# Altium PCB UZ_D_ENDAT.PcbDoc (part 2 of 2)
Units mm, origin at the board's own origin, x right, y up, seen from the top; angles counter-clockwise.
Board outline 155.99 x 100.01 mm, 4 copper layers (Top Layer, GND, VCC, Bottom Layer), stack 0.98 mm thick; 164 components, 121 nets, 547 pads, 92 vias.
Unrouted connection lines stored in the file: 157.
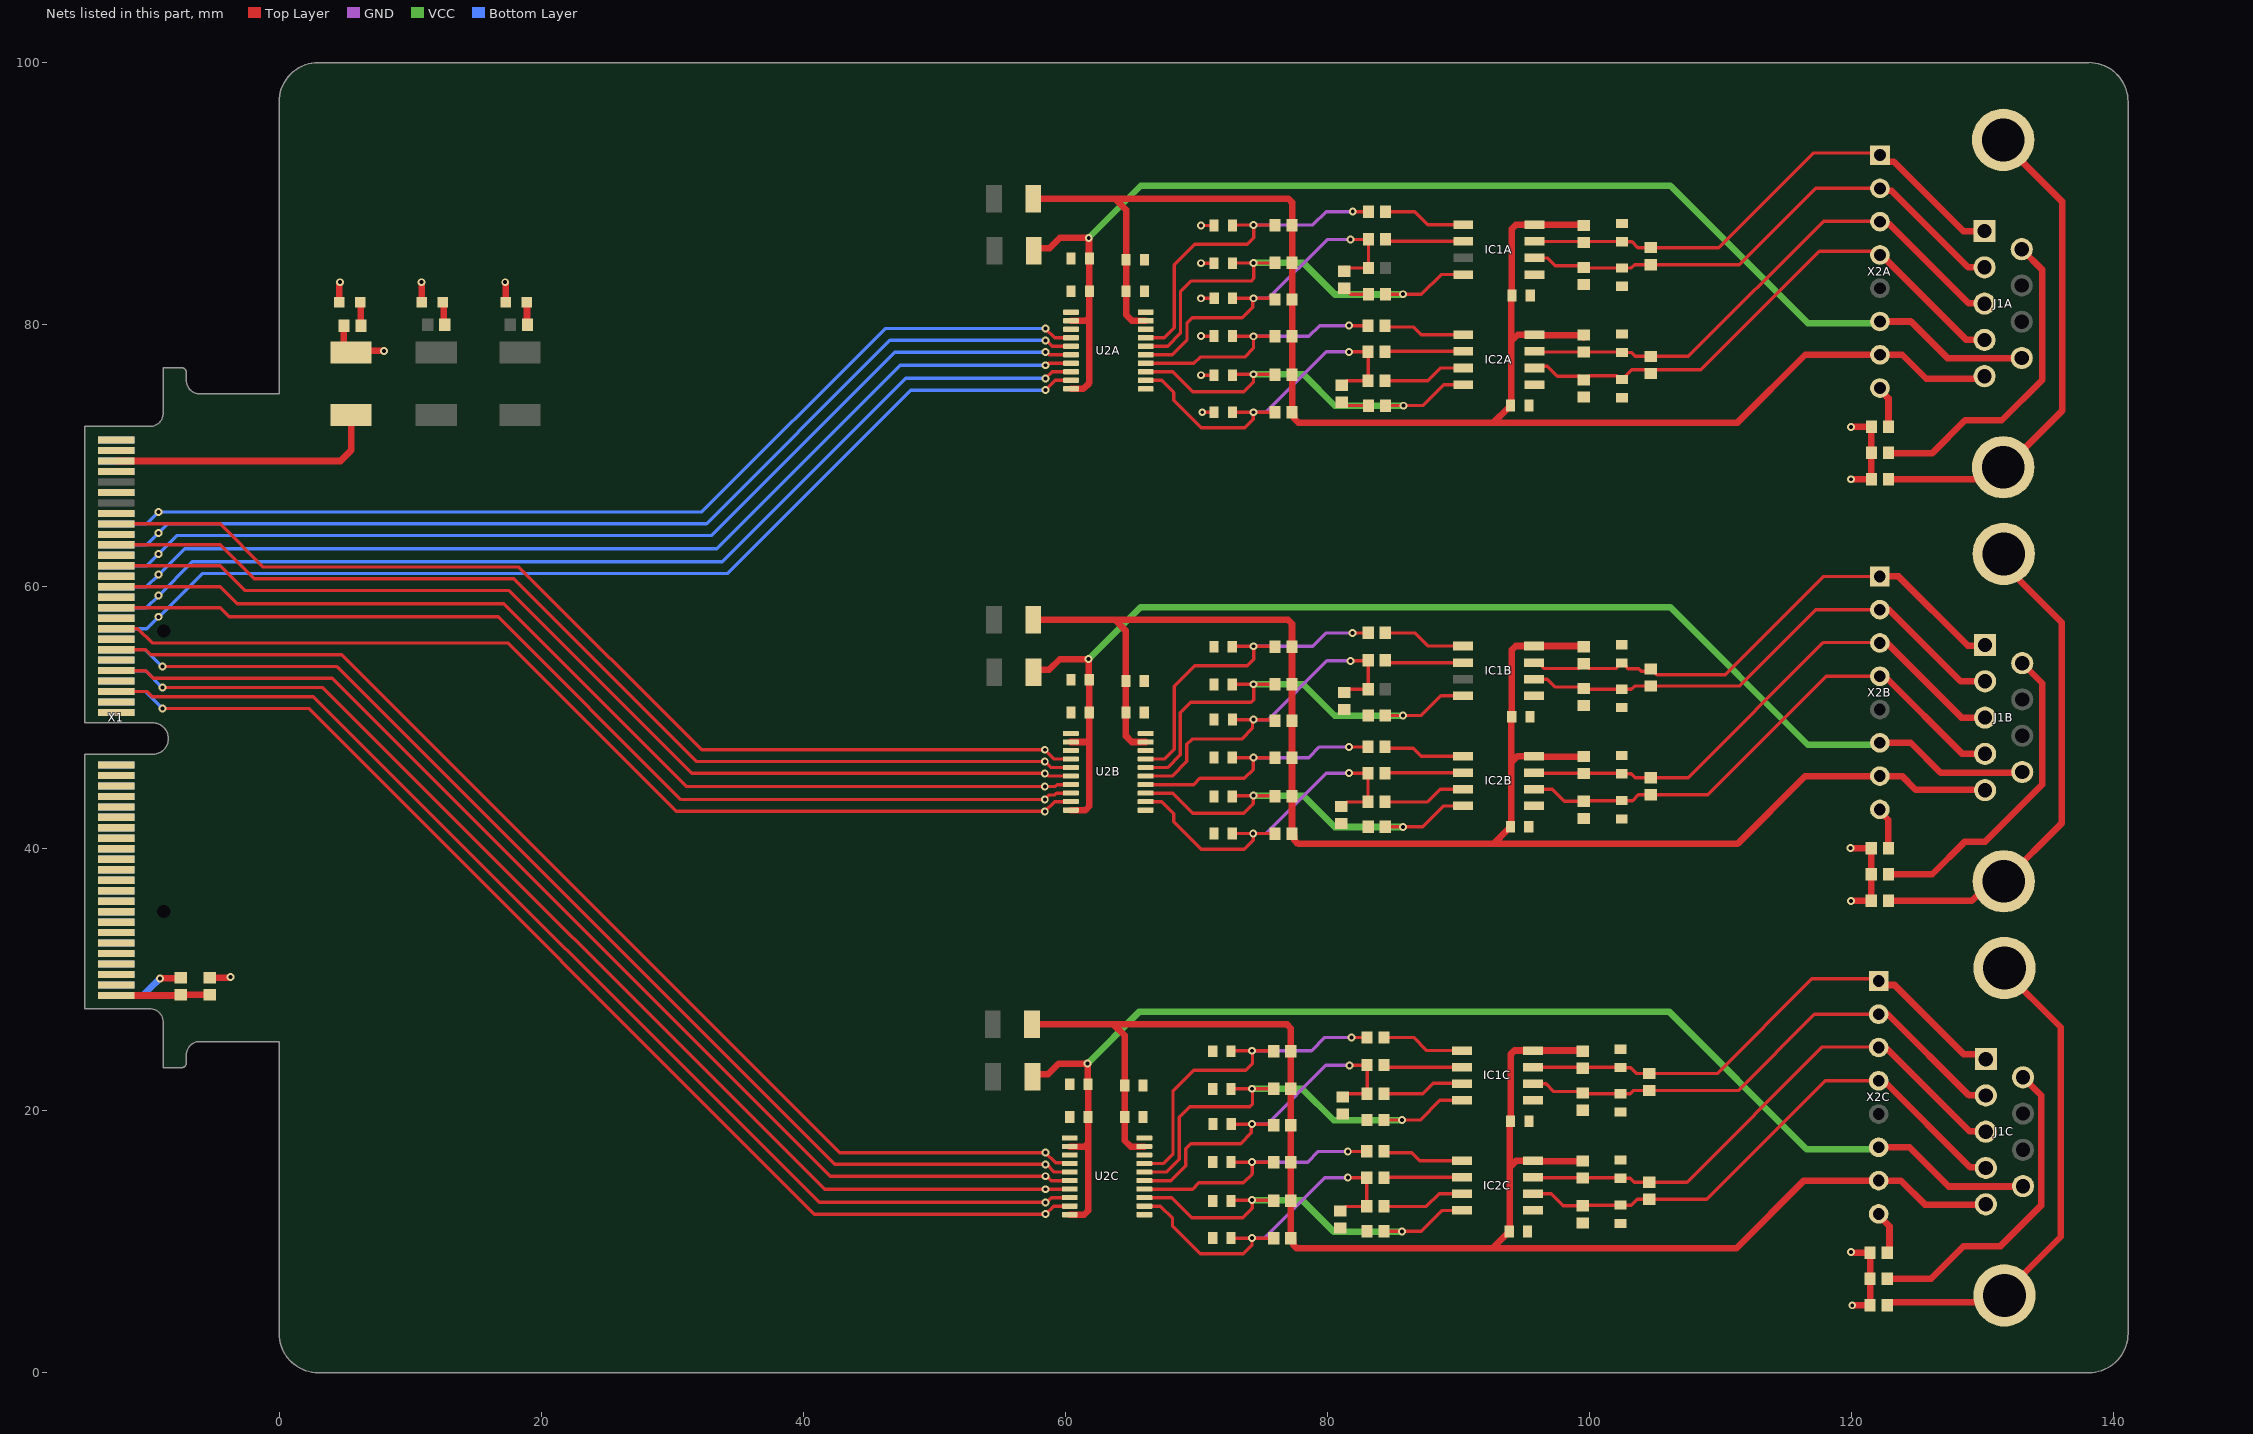
[diagram p4: the nets of this part, all layers, seen from the top]

## Via types
v1: diameter 0.6, hole 0.3, Top Layer to Bottom Layer, tented both sides, 92 vias

## Nets (pads, with @x,y where several pads share a name; then routed paths per layer and width w, separated by ;. In a path a pad name is that pad's centre, name@x,y a point inside that pad or via, vN(x,y) a via of type N, cw(c..) or ccw(c..) an arc to the next point about the centre after c; other vN are vias at no path point) (continued)
75_DE1C: IC1C.3 R12C.2 | length 5.7
  Top Layer w0.254: R12C.2@84.353,21.288 87.303,21.288 88.103,22.088 IC1C.3@89.725,22.088
75_DE2A: IC2A.3 R17A.2 | length 6.4
  Top Layer w0.254: R17A.2@84.428,75.725 87.678,75.725 88.643,76.69 IC2A.3@90.391,76.69
75_DE2B: IC2B.3 R17B.2 | length 6.4
  Top Layer w0.254: R17B.2@84.416,43.566 87.666,43.566 88.631,44.531 IC2B.3@90.379,44.531
75_DE2C: IC2C.3 R17C.2 | length 6.4
  Top Layer w0.254: R17C.2@84.328,12.688 87.578,12.688 88.543,13.653 IC2C.3@90.291,13.653
75_R1A: IC1A.1 R10A.2 | length 6.5
  Top Layer w0.254: R10A.2@84.453,88.625 86.703,88.625 87.698,87.63 IC1A.1@90.491,87.63
75_R1B: IC1B.1 R10B.2 | length 6.5
  Top Layer w0.254: R10B.2@84.441,56.466 86.691,56.466 87.686,55.471 IC1B.1@90.479,55.471
75_R1C: IC1C.1 R10C.2 | length 6.5
  Top Layer w0.254: R10C.2@84.353,25.588 86.603,25.588 87.598,24.593 IC1C.1@90.391,24.593
75_R2A: IC2A.1 R13A.2 | length 6.2
  Top Layer w0.254: R13A.2@84.428,79.825 86.578,79.825 87.178,79.225 IC2A.1@90.391,79.225
75_R2B: IC2B.1 R13B.2 | length 6.2
  Top Layer w0.254: R13B.2@84.416,47.666 86.566,47.666 87.166,47.066 IC2B.1@90.379,47.066
75_R2C: IC2C.1 R13C.2 | length 6.2
  Top Layer w0.254: R13C.2@84.328,16.788 86.478,16.788 87.078,16.188 IC2C.1@90.291,16.188
75_R\E\1A: IC1A.2 R11A.2 | length 6.1
  Top Layer w0.254: R11A.2@84.453,86.525 84.618,86.36 IC1A.2@90.491,86.36
75_R\E\1B: IC1B.2 R11B.2 | length 5.9
  Top Layer w0.254: R11B.2@84.606,54.201 IC1B.2@90.479,54.201
75_R\E\1C: IC1C.2 R11C.2 | length 5.9
  Top Layer w0.254: R11C.2@84.518,23.323 IC1C.2@90.391,23.323
75_R\E\2A: IC2A.2 R14A.2 | length 6
  Top Layer w0.254: R14A.2@84.428,77.925 84.463,77.96 IC2A.2@90.391,77.96
75_R\E\2B: IC2B.2 R14B.2 | length 5.9
  Top Layer w0.254: R14B.2@84.451,45.801 IC2B.2@90.379,45.801
75_R\E\2C: IC2C.2 R14C.2 | length 5.9
  Top Layer w0.254: R14C.2@84.363,14.923 IC2C.2@90.291,14.923
+3V3_A_EA: BS2A.1 C7A.2 C8A.2 J1A.9 U2A.2 U2A.10 X2A.6 | length 97.2
  Top Layer w0.5: BS2A.1@57.603,85.625 57.808,85.83 58.808,85.83 59.603,86.625 v1(61.803,86.625) 61.822,86.606 61.822,85.081 C8A.2@61.853,85.05 C7A.2@61.853,82.55 61.853,80.55 ; U2A.10@60.453,75.1 61.4,75.1 61.853,75.553 61.853,80.55 ; U2A.2@60.453,80.3 61.603,80.3 61.853,80.55 ; X2A.6@122.2,80.24 124.56,80.24 127.35,77.45 J1A.9@133.02,77.45
  VCC w0.5: v1(61.803,86.625) 65.778,90.6 106.2,90.6 116.7,80.1 122.06,80.1 X2A.6@122.2,80.24
+3V3_A_EB: BS2B.1 C7B.2 C8B.2 J1B.9 U2B.2 U2B.10 X2B.6 | length 96.3
  Top Layer w0.5: BS2B.1@57.796,53.671 58.796,53.671 59.591,54.466 v1(61.791,54.466) 61.81,54.446 C8B.2@61.81,52.921 ; U2B.10@60.441,42.941 61.548,42.941 61.841,43.233 61.841,48.391 ; U2B.2@60.441,48.141 61.591,48.141 61.841,48.391 ; C8B.2@61.841,52.891 C7B.2@61.841,50.391 61.841,48.391 ; X2B.6@122.188,48.081 124.548,48.081 126.829,45.8 J1B.9@132.74,45.8
  VCC w0.5: v1(61.791,54.466) 65.766,58.441 106.188,58.441 116.688,47.941 X2B.6@122.048,47.941
+3V3_A_EC: BS2C.1 C7C.2 C8C.2 J1C.9 U2C.2 U2C.10 X2C.6 | length 97.1
  Top Layer w0.5: BS2C.1@57.708,22.793 58.708,22.793 59.503,23.588 v1(61.703,23.588) 61.722,23.569 C8C.2@61.722,22.044 ; U2C.10@60.353,12.063 61.46,12.063 61.753,12.356 61.753,17.513 ; U2C.2@60.353,17.263 61.503,17.263 61.753,17.513 ; C8C.2@61.753,22.013 C7C.2@61.753,19.513 61.753,17.513 ; X2C.6@122.1,17.203 124.46,17.203 127.45,14.213 J1C.9@133.12,14.213
  VCC w0.5: v1(61.703,23.588) 65.678,27.563 106.1,27.563 116.6,17.063 X2C.6@121.96,17.063
+5V_A_EA: BS1A.1 C9A.2 C14A.2 C15A.2 C16A.2 IC1A.8 IC2A.8 J1A.5 R3A.2 R4A.2 R5A.2 R6A.2 R7A.2 R9A.2 R18A.2 R20A.2 U2A.19 X2A.7 | length 129.9
  Top Layer w0.5: BS1A.1@57.576,89.625 63.803,89.625 ; U2A.19@66.153,80.3 65.103,80.3 64.653,80.75 C16A.2@64.653,82.55 C15A.2@64.653,84.95 64.653,88.775 63.803,89.625 ; IC2A.8@95.815,79.23 94.547,79.23 94.053,78.736 ; IC2A.8@95.915,79.18 R20A.2@99.448,79.18 ; R20A.2@99.448,79.155 R20A.2@99.603,79 ; R18A.2@99.603,87.63 IC1A.8@95.815,87.63 94.408,87.63 94.103,87.325 C14A.2@94.103,82.225 94.053,82.175 94.053,78.736 ; J1A.5@130.18,75.865 125.726,75.865 123.891,77.7 X2A.7@122.2,77.7 116.5,77.7 111.325,72.525 92.703,72.525 ; 63.803,89.625 77.035,89.625 77.328,89.332 R3A.2@77.328,87.578 R4A.2@77.328,84.725 R5A.2@77.328,81.919 R6A.2@77.328,79.111 R7A.2@77.328,76.168 R9A.2@77.328,73.311 77.503,73.136 77.503,72.818 77.796,72.525 92.703,72.525 ; 92.703,72.525 93.803,73.625 93.903,73.625 94.053,73.775 94.053,78.736
+5V_A_EB: BS1B.1 C9B.2 C14B.2 C15B.2 C16B.2 IC1B.8 IC2B.8 J1B.5 R3B.2 R4B.2 R5B.2 R6B.2 R7B.2 R9B.2 R18B.2 R20B.2 U2B.19 X2B.7 | length 128.8
  Top Layer w0.5: BS1B.1@57.564,57.465 63.791,57.466 ; U2B.19@66.141,48.141 65.091,48.141 64.641,48.591 C16B.2@64.641,50.391 C15B.2@64.641,52.791 64.641,56.616 63.791,57.466 ; C9B.2@93.791,41.466 92.691,40.366 ; C9B.2@94.041,41.616 94.041,46.576 ; C14B.2@94.041,50.016 94.041,46.576 ; C14B.2@94.091,50.066 94.091,55.166 94.396,55.471 IC1B.8@95.803,55.471 R18B.2@99.591,55.471 ; IC2B.8@95.803,47.071 94.535,47.071 94.041,46.576 ; IC2B.8@95.903,47.021 R20B.2@99.436,47.021 ; J1B.5@130.03,44.5 124.92,44.5 123.88,45.541 X2B.7@122.188,45.541 116.488,45.541 111.313,40.366 92.691,40.366 ; 63.791,57.466 77.023,57.466 77.316,57.173 R3B.2@77.316,55.419 R4B.2@77.316,52.566 R5B.2@77.316,49.76 R6B.2@77.316,46.951 R7B.2@77.316,44.009 R9B.2@77.316,41.151 77.491,40.976 77.491,40.658 77.784,40.366 92.691,40.366
+5V_A_EC: BS1C.1 C9C.2 C14C.2 C15C.2 C16C.2 IC1C.8 IC2C.8 J1C.5 R3C.2 R4C.2 R5C.2 R6C.2 R7C.2 R9C.2 R18C.2 R20C.2 U2C.19 X2C.7 | length 129.5
  Top Layer w0.5: BS1C.1@57.476,26.588 63.703,26.588 ; U2C.19@66.053,17.263 65.003,17.263 64.553,17.713 C16C.2@64.553,19.513 C15C.2@64.553,21.913 64.553,25.738 63.703,26.588 ; C9C.2@93.703,10.588 92.603,9.488 ; C9C.2@93.953,10.738 93.953,15.699 ; C14C.2@93.953,19.138 93.953,15.699 ; C14C.2@94.003,19.188 94.003,24.288 94.308,24.593 IC1C.8@95.715,24.593 R18C.2@99.503,24.593 ; IC2C.8@95.715,16.193 94.447,16.193 93.953,15.699 ; IC2C.8@95.815,16.143 R20C.2@99.348,16.143 ; J1C.5@130.28,12.828 125.626,12.828 123.791,14.663 X2C.7@122.1,14.663 116.4,14.663 111.225,9.488 92.603,9.488 ; 63.703,26.588 76.935,26.588 77.228,26.295 R3C.2@77.228,24.541 R4C.2@77.228,21.688 R5C.2@77.228,18.882 R6C.2@77.228,16.074 R7C.2@77.228,13.131 R9C.2@77.228,10.274 77.403,10.099 77.403,9.781 77.696,9.488 92.603,9.488
ADDR_0: X1.79
ADDR_1: X1.95
ADDR_2: X1.80
Collective_FLT: X1.96
CPLD_DigIn_01: X1.83
CPLD_DigIn_02: X1.85
CPLD_DigOut_01: X1.84
CPLD_DigOut_02: X1.86
DIG_IO_0: U2B.4 X1.17 | length 80.3
  Top Layer w0.254: X1.17@-12.44,64.791 -4.491,64.791 -1.2,61.5 18.3,61.5 32.25,47.55 v1(58.449,47.55) 59.158,46.841 U2B.4@60.441,46.841
DIG_IO_1: U2A.4 X1.18 | length 79.4
  Top Layer w0.254: v1(58.5,79.7) 59.2,79 U2A.4@60.453,79
  Bottom Layer w0.254: X1.18@-12.436,64.795 X1.18@-12.44,64.791 -10.109,64.791 v1(-9.2,65.7) 32.253,65.7 46.253,79.7 v1(58.5,79.7)
DIG_IO_2: U2B.5 X1.21 | length 79.9
  Top Layer w0.254: X1.21@-12.44,63.191 -4.491,63.191 -1.9,60.6 17.927,60.6 31.877,46.65 v1(58.449,46.65) 58.493,46.65 58.952,46.191 U2B.5@60.441,46.191
DIG_IO_3: U2A.5 X1.22 | length 79.6
  Top Layer w0.254: v1(58.5,78.8) 58.563,78.8 59.013,78.35 U2A.5@60.453,78.35
  Bottom Layer w0.254: X1.22@-12.436,63.195 X1.22@-12.44,63.191 -10.109,63.191 v1(-9.2,64.1) -8.5,64.8 32.626,64.8 46.626,78.8 v1(58.5,78.8)
DIG_IO_4: U2B.6 X1.25 | length 79.5
  Top Layer w0.254: X1.25@-12.44,61.591 -4.491,61.591 -2.6,59.7 17.554,59.7 31.504,45.75 v1(58.449,45.75) 58.542,45.75 58.752,45.541 U2B.6@60.441,45.541
DIG_IO_5: U2A.6 X1.26 | length 79.7
  Top Layer w0.254: v1(58.5,77.9) 58.594,77.9 58.794,77.7 U2A.6@60.453,77.7
  Bottom Layer w0.254: X1.26@-12.436,61.595 X1.26@-12.44,61.591 -10.109,61.591 v1(-9.2,62.5) -7.8,63.9 32.999,63.9 46.999,77.9 v1(58.5,77.9)
DIG_IO_6: U2B.7 X1.29 | length 79.3
  Top Layer w0.254: X1.29@-12.44,59.991 -4.491,59.991 -3.2,58.7 17.14,58.7 31.09,44.75 v1(58.449,44.75) 59.255,44.75 59.395,44.891 U2B.7@60.441,44.891
DIG_IO_7: U2A.7 X1.30 | length 80
  Top Layer w0.254: v1(58.5,76.9) 58.594,76.9 58.744,77.05 U2A.7@60.453,77.05
  Bottom Layer w0.254: X1.30@-12.436,59.995 X1.30@-12.44,59.991 -10.127,59.991 v1(-9.2,60.918) -7.218,62.9 33.413,62.9 47.413,76.9 v1(58.5,76.9)
DIG_IO_8: U2B.8 X1.33 | length 79.1
  Top Layer w0.254: X1.33@-12.44,58.391 -4.491,58.391 -3.8,57.7 16.726,57.7 30.676,43.75 v1(58.449,43.75) 58.799,44.1 59.2,44.1 59.341,44.241 U2B.8@60.441,44.241
DIG_IO_9: U2A.8 X1.34 | length 80.4
  Top Layer w0.254: v1(58.5,75.9) 59,76.4 U2A.8@60.453,76.4
  Bottom Layer w0.254: X1.34@-12.436,58.395 X1.34@-12.44,58.391 -10.127,58.391 v1(-9.2,59.318) -6.618,61.9 33.827,61.9 47.827,75.9 v1(58.5,75.9)
DIG_IO_10: U2B.9 X1.37 | length 79
  Top Layer w0.254: X1.37@-12.44,56.791 -10.791,56.791 -9.7,55.7 17.453,55.7 30.303,42.85 v1(58.449,42.85) 59.189,43.591 U2B.9@60.441,43.591
DIG_IO_11: U2A.9 X1.38 | length 80.9
  Top Layer w0.254: v1(58.5,75) 59.25,75.75 U2A.9@60.453,75.75
  Bottom Layer w0.254: X1.38@-12.436,56.795 X1.38@-12.44,56.791 -10.109,56.791 v1(-9.2,57.7) v1@-9.2,57.654 ; v1@-9.2,57.608 v1@-9.2,57.654 ; v1(58.5,75) 48.2,75 34.2,61 -5.854,61 -9.177,57.677 v1@-9.2,57.654
DIG_IO_12: U2C.4 X1.41 | length 89
  Top Layer w0.254: X1.41@-12.44,55.191 -10.191,55.191 -9.8,54.8 4.8,54.8 42.8,16.8 v1(58.5,16.8) 59.278,16.022 60.294,16.022 U2C.4@60.353,15.963
DIG_IO_13: U2C.5 X1.42 | length 89.3
  Top Layer w0.254: v1(-8.9,53.9) 4.427,53.9 42.427,15.9 v1(58.5,15.9) 58.594,15.9 59.181,15.313 U2C.5@60.353,15.313
  Bottom Layer w0.254: X1.42@-12.44,55.191 -12.431,55.2 -10.2,55.2 v1(-8.9,53.9)
DIG_IO_14: U2C.6 X1.45 | length 88.9
  Top Layer w0.254: X1.45@-12.44,53.591 -10.191,53.591 -9.6,53 4.054,53 42.054,15 v1(58.5,15) 58.594,15 58.931,14.663 U2C.6@60.353,14.663
DIG_IO_15: U2C.7 X1.46 | length 89.2
  Top Layer w0.254: v1(-8.9,52.3) 3.34,52.3 41.64,14 v1(58.5,14) 58.506,14.006 60.346,14.006 U2C.7@60.353,14.013
  Bottom Layer w0.254: X1.46@-12.44,53.591 -10.191,53.591 v1(-8.9,52.3)
DIG_IO_16: U2C.8 X1.49 | length 88.8
  Top Layer w0.254: X1.49@-12.1,52 -10.1,52 -9.7,51.6 2.626,51.6 41.226,13 v1(58.5,13) 58.594,13 58.957,13.363 U2C.8@60.353,13.363
DIG_IO_17: U2C.9 X1.50 | length 89.6
  Top Layer w0.254: v1(-8.9,50.7) 2.253,50.7 40.853,12.1 v1(58.5,12.1) 59.113,12.713 U2C.9@60.353,12.713
  Bottom Layer w0.254: X1.50@-12.44,51.991 -10.191,51.991 v1(-8.9,50.7)
DIG_IO_18: X1.53
DIG_IO_19: X1.54
DIG_IO_20: X1.57
DIG_IO_21: X1.58
DIG_IO_22: X1.61
DIG_IO_23: X1.62
DIG_IO_24: X1.65
DIG_IO_25: X1.66
DIG_IO_26: X1.69
DIG_IO_27: X1.70
DIG_IO_28: X1.73
DIG_IO_29: X1.74
DIG_Res_00: X1.78
DIG_Res_03: X1.91
DIG_Res_04: X1.92
DIG_Res_05: X1.93
DIG_Res_06: X1.94
DIG_Res_08: X1.77
GND: C1A.1 C1B.1 C1C.1 C2A.1 C2B.1 C2C.1 C3A.1 C3B.1 C3C.1 C4A.1 C4B.1 C4C.1 C5A.1 C5B.1 C5C.1 C6A.1 C6B.1 C6C.1 C7A.1 C7B.1 C7C.1 C8A.1 C8B.1 C8C.1 C9A.1 C9B.1 C9C.1 C10A.1 C10B.1 C10C.1 C11A.1 C11B.1 C11C.1 C12A.1 C12B.1 C12C.1 C13A.1 C13B.1 C13C.1 C14A.1 C14B.1 C14C.1 C15A.1 C15B.1 C15C.1 C16A.1 C16B.1 C16C.1 D1.1 D2.1 D3.1 IC1A.5 IC1B.5 IC1C.5 IC2A.5 IC2B.5 IC2C.5 R1.1 R15A.1 R15B.1 R15C.1 R16A.1 R16B.1 R16C.1 R19A.1 R19B.1 R19C.1 R21A.1 R21B.1 R21C.1 R23A.1 R23B.1 R23C.1 R24A.1 R24B.1 R24C.1 R26A.2 R26B.2 R26C.2 R27A.2 R27B.2 R27C.2 R28A.1 R28B.1 R28C.1 U2A.1 U2A.3 U2A.11 U2A.18 U2A.20 U2B.1 U2B.3 U2B.11 U2B.18 U2B.20 U2C.1 U2C.3 U2C.11 U2C.18 U2C.20 X1.1 X1.2 X1.3 X1.4 X1.7 X1.8 X1.11 X1.12 X1.15 X1.16 X1.19 X1.20 X1.23 X1.24 X1.27 X1.28 X1.31 X1.32 X1.35 X1.36 X1.39 X1.40 X1.43 X1.44 X1.47 X1.48 X1.51 X1.52 X1.55 X1.56 X1.59 X1.60 X1.63 X1.64 X1.67 X1.68 X1.71 X1.72 X1.75 X1.76 X1.81 X1.82 X1.87 X1.88 X1.97 X1.98 | length 37.4
  Top Layer w0.254: v1(70.368,76.141) C5A.1@71.368,76.141 ; v1(70.368,79.126) C4A.1@71.368,79.126 ; v1(70.368,84.689) C2A.1@71.368,84.689 ; v1(70.368,87.567) C1A.1@71.368,87.567 ; v1(70.378,82.011) C3A.1@71.378,82.011 ; v1(70.468,73.311) C6A.1@71.368,73.311 ; R15A.1@81.103,73.875 81.153,73.825 R24A.1@83.153,73.825 ; R16A.1@81.303,82.775 81.353,82.775 81.803,82.325 R23A.1@83.153,82.325
  Top Layer w0.5: R1.1@-5.3,30.15 -3.777,30.15 -3.727,30.2 v1(-3.7,30.2) ; D1.1@4.6,81.7 4.6,83.153 4.661,83.214 v1(4.661,83.241) ; v1(10.861,83.241) 10.861,83.214 10.9,83.175 D2.1@10.9,81.7 ; v1(17.261,83.241) 17.261,83.214 17.3,83.175 D3.1@17.3,81.7 ; v1(119.961,40.041) 119.963,40.043 121.537,40.043 R27B.2@121.538,40.045 R26B.2@121.538,38.053 R28B.1@121.538,36.023 121.527,36.011 120.011,36.011 v1(120,36) ; v1(120,9.2) 120.027,9.2 120.06,9.167 R27C.2@121.45,9.167 R28C.1@121.45,5.145 v1(120.082,5.145) ; v1(120,68.2) 120.009,68.191 R28A.1@121.541,68.191 ; v1(120,72.2) 120.002,72.202 121.548,72.202 R27A.2@121.55,72.204 121.55,68.2 R28A.1@121.541,68.191 ; R28A.1@121.55,68.182 R28A.1@121.541,68.191
GND_DSUBA: J1A.6 R26A.1 | length 24.7
  Top Layer w0.5: R26A.1@122.85,70.213 122.863,70.2 126.2,70.2 128.7,72.7 131.5,72.7 134.6,75.8 134.6,84.18 J1A.6@133.02,85.76
GND_DSUBB: J1B.6 R26B.1 | length 24.5
  Top Layer w0.5: R26B.1@122.851,38.041 126.188,38.041 128.688,40.541 130.241,40.541 134.588,44.888 134.588,52.632 J1B.6@133.061,54.16
GND_DSUBC: J1C.6 R26C.1 | length 24.4
  Top Layer w0.5: R26C.1@122.763,7.163 126.1,7.163 128.6,9.663 131.4,9.663 134.5,12.763 134.5,21.17 J1C.6@133.12,22.55
GND_HA: R27A.1 X2A.8 | length 3.2
  Top Layer w0.5: X2A.8@122.2,75.16 122.2,75.017 122.85,74.367 R27A.1@122.85,72.204
GND_HB: R27B.1 X2B.8 | length 3.1
  Top Layer w0.5: X2B.8@122.188,42.879 122.188,42.858 122.838,42.208 R27B.1@122.838,40.045
GND_HC: R27C.1 X2C.8 | length 3
  Top Layer w0.5: X2C.8@122.1,12.002 122.925,11.177 R27C.1@122.925,9.342
I2C0_SCL: X1.89
I2C0_SDA: X1.90
NetD1_2: D1.2 R8.1 | length 1.8
  Top Layer w0.5: D1.2@6.2,81.7 6.225,81.675 6.225,79.925 R8.1@6.25,79.9
NetD2_2: D2.2 R29.1 | length 1.8
  Top Layer w0.5: D2.2@12.5,81.7 12.575,81.625 12.575,80.075 R29.1@12.65,80
NetD3_2: D3.2 R30.1 | length 1.7
  Top Layer w0.5: D3.2@18.9,81.7 18.925,81.675 18.925,80.025 R30.1@18.95,80
NetJ1A_10: J1A.10 J1A.11 R28A.2 | length 37.8
  Top Layer w0.5: R28A.2@122.85,68.182 129.52,68.182 130.247,68.91 131.6,68.91 136.1,73.41 136.1,89.4 J1A.10@131.6,93.9
NetJ1B_10: J1B.10 J1B.11 R28B.2 | length 37.4
  Top Layer w0.5: R28B.2@122.838,36.023 129.218,36.023 130.705,37.51 J1B.11@131.641,37.51 136.088,41.957 136.088,57.241 J1B.10@131.588,61.741
NetJ1C_10: J1C.10 J1C.11 R28C.2 | length 37.5
  Top Layer w0.5: R28C.2@122.925,5.37 130.997,5.37 136,10.373 136,26.363 J1C.10@131.5,30.863
PILOT_IN: R2.1 X1.100 | length 5.5
  Top Layer w0.5: v1(-9.1,30.1) -9.081,30.119 -7.531,30.119 R2.1@-7.5,30.15
  Bottom Layer w0.5: X1.100@-12.43,28.801 -10.399,28.801 -9.89,29.31 v1(-9.1,30.1)
PILOT_OUT: R1.2 R2.2 X1.99 | length 7.2
  Top Layer w0.5: X1.99@-12.44,28.791 -12.309,28.791 -12.3,28.8 -12.291,28.791 -7.559,28.791 R2.2@-7.5,28.85 R1.2@-5.3,28.85
READ_WRITE_CLOCKA: C6A.2 R9A.1 R14A.1 R15A.2 R17A.1 U2A.12 | length 29.2
  Top Layer w0.254: U2A.12@66.153,75.75 67.378,75.75 68.303,74.825 68.303,74.225 70.403,72.125 73.703,72.125 74.368,72.791 v1(74.368,73.311) ; C6A.2@72.768,73.311 v1(74.368,73.311) ; R9A.1@76.028,73.311 v1(74.368,73.311) ; R15A.2@81.103,75.375 81.153,75.375 81.503,75.725 R17A.1@83.128,75.725 R14A.1@83.128,77.925 v1(81.678,77.925)
  GND w0.254: v1(74.368,73.311) 75.311,73.311 79.925,77.925 v1(81.678,77.925)
READ_WRITE_CLOCKB: C6B.2 R9B.1 R14B.1 R15B.2 R17B.1 U2B.12 | length 28.6
  Top Layer w0.254: U2B.12@66.141,43.591 67.366,43.591 68.291,42.666 68.291,42.066 70.391,39.966 73.691,39.966 74.357,40.631 v1(74.357,41.151) ; C6B.2@72.757,41.151 v1(74.357,41.151) ; R9B.1@76.016,41.151 v1(74.357,41.151) ; R15B.2@81.491,43.566 R17B.1@83.116,43.566 R14B.1@83.116,45.766 v1(81.666,45.766)
  GND w0.254: v1(74.357,41.151) 75.299,41.151 79.913,45.766 v1(81.666,45.766)
READ_WRITE_CLOCKC: C6C.2 R9C.1 R14C.1 R15C.2 R17C.1 U2C.12 | length 28.6
  Top Layer w0.254: U2C.12@66.053,12.713 67.278,12.713 68.203,11.788 68.203,11.188 70.303,9.088 73.603,9.088 74.268,9.754 v1(74.268,10.274) ; C6C.2@72.668,10.274 v1(74.268,10.274) ; R9C.1@75.928,10.274 v1(74.268,10.274) ; R15C.2@81.403,12.688 R17C.1@83.028,12.688 R14C.1@83.028,14.888 v1(81.578,14.888)
  GND w0.254: v1(74.268,10.274) 75.211,10.274 79.825,14.888 v1(81.578,14.888)
READ_WRITE_DATAA: C3A.2 R5A.1 R11A.1 R12A.1 R16A.2 U2A.15 | length 29.2
  Top Layer w0.254: U2A.15@66.153,77.7 68.178,77.7 69.303,78.825 69.303,80.125 69.703,80.525 73.503,80.525 74.311,81.334 74.311,81.945 v1(74.378,82.011) ; C3A.2@72.768,81.883 72.896,82.011 v1(74.378,82.011) ; R5A.1@76.028,81.919 75.936,82.011 v1(74.378,82.011) ; R16A.2@81.303,84.375 81.353,84.325 R12A.1@83.153,84.325 R11A.1@83.153,86.525 83.122,86.495 v1(81.796,86.495)
  GND w0.254: v1(74.378,82.011) 75.511,82.011 79.995,86.495 v1(81.796,86.495)
READ_WRITE_DATAB: C3B.2 R5B.1 R11B.1 R12B.1 R16B.2 U2B.15 | length 28.8
  Top Layer w0.254: U2B.15@66.141,45.541 68.166,45.541 69.291,46.666 69.291,47.966 69.691,48.366 73.491,48.366 74.3,49.174 74.3,49.785 v1(74.366,49.851) ; C3B.2@72.884,49.851 v1(74.366,49.851) ; R5B.1@75.924,49.851 v1(74.366,49.851) ; R16B.2@81.341,52.166 R12B.1@83.141,52.166 R11B.1@83.141,54.366 ; v1(81.785,54.335) R11B.1@83.111,54.335
  GND w0.254: v1(74.366,49.851) 75.499,49.851 79.983,54.335 v1(81.785,54.335)
READ_WRITE_DATAC: C3C.2 R5C.1 R11C.1 R12C.1 R16C.2 U2C.15 | length 28.8
  Top Layer w0.254: U2C.15@66.053,14.663 68.078,14.663 69.203,15.788 69.203,17.088 69.603,17.488 73.403,17.488 74.211,18.297 74.211,18.908 v1(74.278,18.974) ; C3C.2@72.796,18.974 v1(74.278,18.974) ; R5C.1@75.836,18.974 v1(74.278,18.974) ; R16C.2@81.253,21.288 R12C.1@83.053,21.288 R11C.1@83.053,23.488 ; v1(81.696,23.458) R11C.1@83.022,23.458
  GND w0.254: v1(74.278,18.974) 75.411,18.974 79.895,23.458 v1(81.696,23.458)
RS485_A_CLOCKA: C11A.2 IC2A.6 J1A.4 R21A.2 R25A.1 X2A.4 | length 42.3
  Top Layer w0.254: IC2A.6@95.815,76.69 95.955,76.83 96.809,76.83 97.584,76.056 99.322,76.056 R21A.2@99.603,75.775 99.901,76.073 100.067,76.073 100.099,76.106 102.122,76.106 102.403,75.825 102.603,75.825 102.826,76.048 102.826,76.148 103.234,76.556 104.422,76.556 R25A.1@104.703,76.275 104.984,76.556 108.534,76.556 117.579,85.601 121.582,85.601 121.863,85.32 X2A.4@122.2,85.32
  Top Layer w0.5: X2A.4@122.205,85.325 122.314,85.325 128.804,78.835 J1A.4@130.18,78.835
RS485_A_CLOCKB: C11B.2 IC2B.6 J1B.4 R21B.2 R25B.1 X2B.4 | length 41.1
  Top Layer w0.254: IC2B.6@95.803,44.531 97.198,44.531 98.113,43.616 R21B.2@99.591,43.616 ; R21B.2@99.641,43.666 C11B.2@102.491,43.666 103.313,43.666 103.763,44.116 R25B.1@104.691,44.116 109.063,44.116 118.108,53.161 X2B.4@122.188,53.161
  Top Layer w0.5: X2B.4@122.188,53.161 122.568,53.161 128.494,47.235 J1B.4@130.221,47.235
RS485_A_CLOCKC: C11C.2 IC2C.6 J1C.4 R21C.2 R25C.1 X2C.4 | length 41.6
  Top Layer w0.254: IC2C.6@95.715,13.653 97.11,13.653 98.025,12.738 R21C.2@99.503,12.738 ; R21C.2@99.553,12.788 C11C.2@102.403,12.788 103.225,12.788 103.675,13.238 R25C.1@104.603,13.238 108.975,13.238 118.02,22.283 X2C.4@122.1,22.283
  Top Layer w0.5: X2C.4@122.1,22.283 122.48,22.283 129.081,15.682 130.223,15.682 J1C.4@130.28,15.625
RS485_A_DATAA: C10A.2 IC1A.6 J1A.2 R19A.2 R22A.1 X2A.2 | length 39.6
  Top Layer w0.254: IC1A.6@95.815,85.09 96.81,85.09 97.4,84.5 99.478,84.5 R19A.2@99.603,84.375 99.653,84.325 C10A.2@102.503,84.325 103.225,84.325 103.475,84.575 R22A.1@104.703,84.575 111.475,84.575 117.3,90.4 X2A.2@122.2,90.4
  Top Layer w0.5: X2A.2@122.2,90.4 122.391,90.209 123.091,90.209 128.925,84.375 129.98,84.375 J1A.2@130.08,84.275
RS485_A_DATAB: C10B.2 IC1B.6 J1B.2 R19B.2 R22B.1 X2B.2 | length 39.3
  Top Layer w0.254: IC1B.6@95.803,52.931 96.798,52.931 97.388,52.341 R19B.2@99.466,52.341 ; R19B.2@99.641,52.166 C10B.2@102.491,52.166 103.213,52.166 103.463,52.416 R22B.1@104.691,52.416 111.463,52.416 117.288,58.241 X2B.2@122.188,58.241
  Top Layer w0.5: X2B.2@122.188,58.241 122.888,58.241 128.354,52.775 J1B.2@130.221,52.775
RS485_A_DATAC: C10C.2 IC1C.6 J1C.2 R19C.2 R22C.1 X2C.2 | length 39.7
  Top Layer w0.254: IC1C.6@95.715,22.053 96.71,22.053 97.3,21.463 R19C.2@99.378,21.463 ; R19C.2@99.553,21.288 C10C.2@102.403,21.288 103.125,21.288 103.375,21.538 R22C.1@104.603,21.538 111.375,21.538 117.2,27.363 X2C.2@122.1,27.363
  Top Layer w0.5: X2C.2@122.1,27.363 122.8,27.363 128.998,21.165 J1C.2@130.28,21.165
RS485_B_CLOCKA: C13A.2 IC2A.7 J1A.3 R20A.1 R25A.2 X2A.3 | length 41.3
  Top Layer w0.254: IC2A.7@95.815,77.96 95.857,77.918 102.46,77.918 C13A.2@102.503,77.875 103.225,77.875 103.525,77.575 R25A.2@104.703,77.575 107.575,77.575 117.9,87.9 122.16,87.9 X2A.3@122.2,87.86
  Top Layer w0.5: X2A.3@122.2,87.86 122.391,87.669 122.931,87.669 128.96,81.64 129.945,81.64 J1A.3@130.045,81.54
RS485_B_CLOCKB: C13B.2 IC2B.7 J1B.3 R20B.1 R25B.2 X2B.3 | length 41.1
  Top Layer w0.254: IC2B.7@95.846,45.758 C13B.2@102.449,45.758 ; C13B.2@102.491,45.716 103.213,45.716 103.513,45.416 R25B.2@104.691,45.416 107.563,45.416 117.888,55.741 X2B.3@122.148,55.741
  Top Layer w0.5: X2B.3@122.188,55.701 122.728,55.701 128.424,50.005 J1B.3@130.221,50.005
RS485_B_CLOCKC: C13C.2 IC2C.7 J1C.3 R20C.1 R25C.2 X2C.3 | length 41.5
  Top Layer w0.254: IC2C.7@95.757,14.88 C13C.2@102.36,14.88 ; C13C.2@102.403,14.838 103.125,14.838 103.425,14.538 R25C.2@104.603,14.538 107.475,14.538 117.8,24.863 X2C.3@122.06,24.863
  Top Layer w0.5: X2C.3@122.1,24.823 122.64,24.823 129.046,18.417 130.258,18.417 J1C.3@130.28,18.395
RS485_B_DATAA: C12A.2 IC1A.7 J1A.1 R18A.1 R22A.2 X2A.1 | length 40
  Top Layer w0.254: IC1A.7@95.815,86.36 95.832,86.343 102.485,86.343 C12A.2@102.503,86.325 103.275,86.325 103.725,85.875 R22A.2@104.703,85.875 109.875,85.875 117.1,93.1 122.04,93.1 X2A.1@122.2,92.94
  Top Layer w0.5: X2A.1@122.2,92.94 122.7,92.44 123.26,92.44 128.555,87.145 J1A.1@130.18,87.145
RS485_B_DATAB: C12B.2 IC1B.7 J1B.1 R18B.1 R22B.2 X2B.1 | length 41
  Top Layer w0.254: IC1B.7@95.803,54.201 96.241,54.201 96.439,54.003 96.439,53.898 96.587,53.749 99.175,53.749 99.541,54.116 99.641,54.116 100.008,53.749 102.019,53.749 102.168,53.898 102.168,53.943 102.391,54.166 102.591,54.166 102.814,53.943 102.814,53.88 102.963,53.731 103.797,53.731 103.984,53.545 104.521,53.545 R22B.2@104.691,53.716 104.741,53.716 105.175,53.281 110.397,53.281 117.897,60.781 X2B.1@122.188,60.781
  Top Layer w0.5: X2B.1@122.188,60.781 123.619,60.781 128.919,55.481 130.157,55.481 J1B.1@130.221,55.545
RS485_B_DATAC: C12C.2 IC1C.7 J1C.1 R18C.1 R22C.2 X2C.1 | length 40
  Top Layer w0.254: IC1C.7@95.732,23.305 C12C.2@102.385,23.305 ; C12C.2@102.403,23.288 103.175,23.288 103.625,22.838 R22C.2@104.603,22.838 109.775,22.838 117,30.063 X2C.1@121.94,30.063
  Top Layer w0.5: X2C.1@122.1,29.903 122.41,29.593 123.307,29.593 128.578,24.322 129.893,24.322 J1C.1@130.28,23.935
RX-S_CLOCKA: C4A.2 R6A.1 R13A.1 U2A.14 | length 22
  Top Layer w0.254: U2A.14@66.153,77.05 69.828,77.05 70.303,77.525 73.703,77.525 74.378,78.2 v1(74.378,79.111) ; C4A.2@72.768,79.126 72.783,79.111 v1(74.378,79.111) ; R6A.1@76.028,79.111 v1(74.378,79.111) ; v1(81.678,79.925) R13A.1@83.128,79.925
  GND w0.254: v1(74.378,79.111) 78.611,79.111 79.425,79.925 v1(81.678,79.925)
RX-S_CLOCKB: C4B.2 R6B.1 R13B.1 U2B.14 | length 21.9
  Top Layer w0.254: U2B.14@66.141,44.891 69.816,44.891 70.291,45.366 73.691,45.366 74.366,46.041 v1(74.366,46.951) ; C4B.2@72.771,46.951 v1(74.366,46.951) ; R6B.1@76.016,46.951 v1(74.366,46.951) ; v1(81.666,47.766) R13B.1@83.116,47.766
  GND w0.254: v1(74.366,46.951) 78.599,46.951 79.413,47.766 v1(81.666,47.766)
RX-S_CLOCKC: C4C.2 R6C.1 R13C.1 U2C.14 | length 21.9
  Top Layer w0.254: U2C.14@66.053,14.013 69.728,14.013 70.203,14.488 73.603,14.488 74.278,15.163 v1(74.278,16.074) ; C4C.2@72.683,16.074 v1(74.278,16.074) ; R6C.1@75.928,16.074 v1(74.278,16.074) ; v1(81.578,16.888) R13C.1@83.028,16.888
  GND w0.254: v1(74.278,16.074) 78.511,16.074 79.325,16.888 v1(81.578,16.888)
RX-S_DATAA: C1A.2 R3A.1 R10A.1 U2A.17 | length 27.7
  Top Layer w0.254: U2A.17@66.153,79 67.578,79 68.335,79.757 68.335,84.557 69.903,86.125 73.903,86.125 74.403,86.625 74.403,87.586 v1(74.378,87.611) ; C1A.2@72.768,87.567 72.813,87.611 v1(74.378,87.611) ; R3A.1@76.028,87.578 75.995,87.611 v1(74.378,87.611) ; v1(81.953,88.625) R10A.1@83.153,88.625
  GND w0.254: v1(74.378,87.611) 78.911,87.611 79.925,88.625 v1(81.953,88.625)
RX-S_DATAB: C1B.2 R3B.1 R10B.1 U2B.17 | length 27.6
  Top Layer w0.254: U2B.17@66.141,46.841 67.566,46.841 68.323,47.598 68.323,52.398 69.891,53.966 73.891,53.966 74.391,54.466 74.391,55.426 v1(74.366,55.451) ; C1B.2@72.801,55.451 v1(74.366,55.451) ; R3B.1@75.984,55.451 v1(74.366,55.451) ; v1(81.941,56.466) R10B.1@83.141,56.466
  GND w0.254: v1(74.366,55.451) 78.899,55.451 79.913,56.466 v1(81.941,56.466)
RX-S_DATAC: C1C.2 R3C.1 R10C.1 U2C.17 | length 27.6
  Top Layer w0.254: U2C.17@66.053,15.963 67.478,15.963 68.235,16.72 68.235,21.52 69.803,23.088 73.803,23.088 74.303,23.588 74.303,24.549 v1(74.278,24.574) ; C1C.2@72.713,24.574 v1(74.278,24.574) ; R3C.1@75.895,24.574 v1(74.278,24.574) ; v1(81.853,25.588) R10C.1@83.053,25.588
  GND w0.254: v1(74.278,24.574) 78.811,24.574 79.825,25.588 v1(81.853,25.588)
TX-S_CLOCKA: C5A.2 IC2A.4 R7A.1 R24A.2 U2A.13 | length 32.1
  Top Layer w0.254: U2A.13@66.153,76.4 68.228,76.4 69.753,74.875 73.653,74.875 74.378,75.6 v1(74.378,76.211) ; C5A.2@72.768,76.141 72.838,76.211 v1(74.378,76.211) ; R7A.1@76.028,76.168 75.985,76.211 v1(74.378,76.211) ; R24A.2@84.453,73.825 87.303,73.825 88.898,75.42 IC2A.4@90.391,75.42
  VCC w0.5: v1(74.378,76.211) 78.189,76.211 80.588,73.812 v1(85.815,73.812)
TX-S_CLOCKB: C5B.2 IC2B.4 R7B.1 R24B.2 U2B.13 | length 31.9
  Top Layer w0.254: U2B.13@66.141,44.241 68.216,44.241 69.741,42.716 73.641,42.716 74.366,43.441 v1(74.366,44.051) ; C5B.2@72.827,44.051 v1(74.366,44.051) ; R7B.1@75.973,44.051 v1(74.366,44.051) ; R24B.2@84.441,41.666 87.291,41.666 88.886,43.261 IC2B.4@90.379,43.261
  VCC w0.5: v1(74.366,44.051) 78.178,44.051 80.577,41.652 v1(85.804,41.652)
TX-S_CLOCKC: C5C.2 IC2C.4 R7C.1 R24C.2 U2C.13 | length 31.9
  Top Layer w0.254: U2C.13@66.053,13.363 68.128,13.363 69.653,11.838 73.553,11.838 74.278,12.563 v1(74.278,13.174) ; C5C.2@72.738,13.174 v1(74.278,13.174) ; R7C.1@75.885,13.174 v1(74.278,13.174) ; R24C.2@84.353,10.788 87.203,10.788 88.798,12.383 IC2C.4@90.291,12.383
  VCC w0.5: v1(74.278,13.174) 78.089,13.174 80.488,10.775 v1(85.715,10.775)
TX-S_DATAA: C2A.2 IC1A.4 R4A.1 R23A.2 U2A.16 | length 35.3
  Top Layer w0.254: U2A.16@66.153,78.35 67.828,78.35 68.803,79.325 68.803,82.525 69.603,83.325 74.203,83.325 74.403,83.525 74.403,84.686 v1(74.378,84.711) ; C2A.2@72.768,84.689 72.79,84.711 v1(74.378,84.711) ; R4A.1@76.028,84.725 76.014,84.711 v1(74.378,84.711) ; R23A.2@84.453,82.325 v1(85.803,82.325) 87.203,82.325 88.703,83.825 IC1A.4@89.986,83.825 ; IC1A.4@89.991,83.82 IC1A.4@89.986,83.825 ; IC1A.4@89.991,83.825 IC1A.4@89.986,83.825
  VCC w0.5: v1(74.378,84.711) 78.189,84.711 80.6,82.3 85.778,82.3 v1(85.803,82.325)
TX-S_DATAB: C2B.2 IC1B.4 R4B.1 R23B.2 U2B.16 | length 35.3
  Top Layer w0.254: U2B.16@66.141,46.191 67.816,46.191 68.791,47.166 68.791,50.366 69.591,51.166 74.191,51.166 74.391,51.366 74.391,52.526 v1(74.366,52.551) ; C2B.2@72.778,52.551 v1(74.366,52.551) ; R4B.1@76.002,52.551 v1(74.366,52.551) ; R23B.2@84.441,50.166 v1(85.791,50.166) 87.191,50.166 88.691,51.666 IC1B.4@89.974,51.666
  VCC w0.5: v1(74.366,52.551) 78.178,52.551 80.588,50.141 85.766,50.141 v1(85.791,50.166)
TX-S_DATAC: C2C.2 IC1C.4 R4C.1 R23C.2 U2C.16 | length 35.3
  Top Layer w0.254: U2C.16@66.053,15.313 67.728,15.313 68.703,16.288 68.703,19.488 69.503,20.288 74.103,20.288 74.303,20.488 74.303,21.649 v1(74.278,21.674) ; C2C.2@72.69,21.674 v1(74.278,21.674) ; R4C.1@75.914,21.674 v1(74.278,21.674) ; R23C.2@84.353,19.288 v1(85.703,19.288) 87.103,19.288 88.603,20.788 IC1C.4@89.886,20.788
  VCC w0.5: v1(74.278,21.674) 78.089,21.674 80.5,19.263 85.678,19.263 v1(85.703,19.288)
VIN_fused: F1.2 R8.2 | length 4.8
  Top Layer w0.5: R8.2@4.95,79.9 4.95,78.44 F1.2@5.5,77.89 5.61,78 v1(8,78)
VIN_unfused: F1.1 X1.5 X1.6 | length 21
  Top Layer w0.5: X1.5@-12.44,69.591 4.691,69.591 5.5,70.4 F1.1@5.5,73.11
pads on no net: J1A.7 J1A.8 J1B.7 J1B.8 J1C.7 J1C.8 MH1.1 MH2.1 X2A.5 X2B.5 X2C.5

## Polygon pours and split planes (outlines as drawn)
no net on GND "NONET_L02_P000" (solid, pour order 0): -14.9,100.1 141.2,100.1 141.2,-0.1 -14.9,-0.1

## Silkscreen, mask and mechanical layers (free items; w line width, h text height)
Top Overlay:
  text "B_DATA_A" at 112.7,92.567 h1
  text "A_DATA_A" at 112.7,89.967 h1
  text "B_CLOCK_A" at 111.7,87.567 h1
  text "B_CLOCK_A" at 111.7,84.967 h1
  text "3V3" at 117.7,79.6 h1
  text "5V" at 118.7,77.4 h1
  text "GND" at 117.7,74.8 h1
  text "VIN" at 4.2,70.6 h1
  text "5V" at 11.2,70.6 h1
  text "3V3" at 17.2,70.5 h1
  text "B_DATA_B" at 112.7,60.367 h1
  text "A_DATA_B" at 112.7,57.767 h1
  text "B_CLOCK_B" at 111.7,55.267 h1
  text "B_CLOCK_B" at 111.7,52.667 h1
  text "3V3" at 117.7,47.7 h1
  text "5V" at 118.7,45 h1
  text "GND" at 117.7,42.5 h1
  text "B_DATA_C" at 110.4,28.167 h1
  text "A_DATA_C" at 110.4,25.667 h1
  text "B_CLOCK_C" at 110.4,23.067 h1
  text "B_CLOCK_C" at 110.4,20.567 h1
  text "3V3" at 116.1,15.8 h1
  text "5V" at 116.7,13.3 h1
  text "GND" at 116.1,10.9 h1
Mechanical 1:
  lines w0.1: 141.141,97 141.141,3 cw(c138.141,3) 138.141,0 3,0 cw(c3,3) 0,3 0,25.275 -6.073,25.275 ccw(c-6.073,24.275) -7.073,24.275 -7.073,23.675 cw(c-7.473,23.675) -7.473,23.275 -8.853,23.275 -8.853,26.775 ccw(c-9.853,26.775) -9.853,27.775 -14.853,27.775 -14.853,47.2 -9.653,47.2 ccw(c-9.653,48.4) -9.653,49.6 -14.853,49.6 -14.853,72.225 -9.853,72.225 ccw(c-9.853,73.225) -8.853,73.225 -8.853,76.725 -7.473,76.725 cw(c-7.473,76.325) -7.073,76.325 -7.073,75.725 ccw(c-6.073,75.725) -6.073,74.725 0,74.725 0,97 cw(c3,97) 3,100 138.141,100.01 cw(c138.141,97.01) 141.141,97.01

## Dimensions
141.141,0 to 141.141,100 on Mechanical 2
146.143,97.802 to -14.84,72.216 on Mechanical 2
141.141,100 to -14.853,72.225 on Mechanical 2
141.141,100 to 0.031,100 on Mechanical 2

## Text inside footprints (layer, text, board x,y; h text height)
J1A: Top Overlay "6" at 136.125,86.26 h1 r270; Top Overlay "9" at 136.125,77.95 h1 r270; Top Overlay "5" at 126.725,76.565 h1 r270; Top Overlay "1" at 126.725,87.395 h1 r270
J1B: Top Overlay "1" at 126.766,55.795 h1 r270; Top Overlay "5" at 126.766,44.965 h1 r270; Top Overlay "9" at 136.166,46.35 h1 r270; Top Overlay "6" at 136.166,54.66 h1 r270
J1C: Top Overlay "1" at 126.825,24.185 h1 r270; Top Overlay "5" at 126.825,13.355 h1 r270; Top Overlay "9" at 136.225,14.74 h1 r270; Top Overlay "6" at 136.225,23.05 h1 r270
Serial1: Top Assembly "SerialNr" at 30.1,6.5 h1 r180